# Altium PCB microlab.PcbDoc
Units mil, origin at the board's own origin, x right, y up, seen from the top; angles counter-clockwise.
Board outline 3937.71 x 1968.5 mil, 2 copper layers (Component Side, Bottom Layer), stack 12.8 mil thick; 89 components, 62 nets, 298 pads, 38 vias.
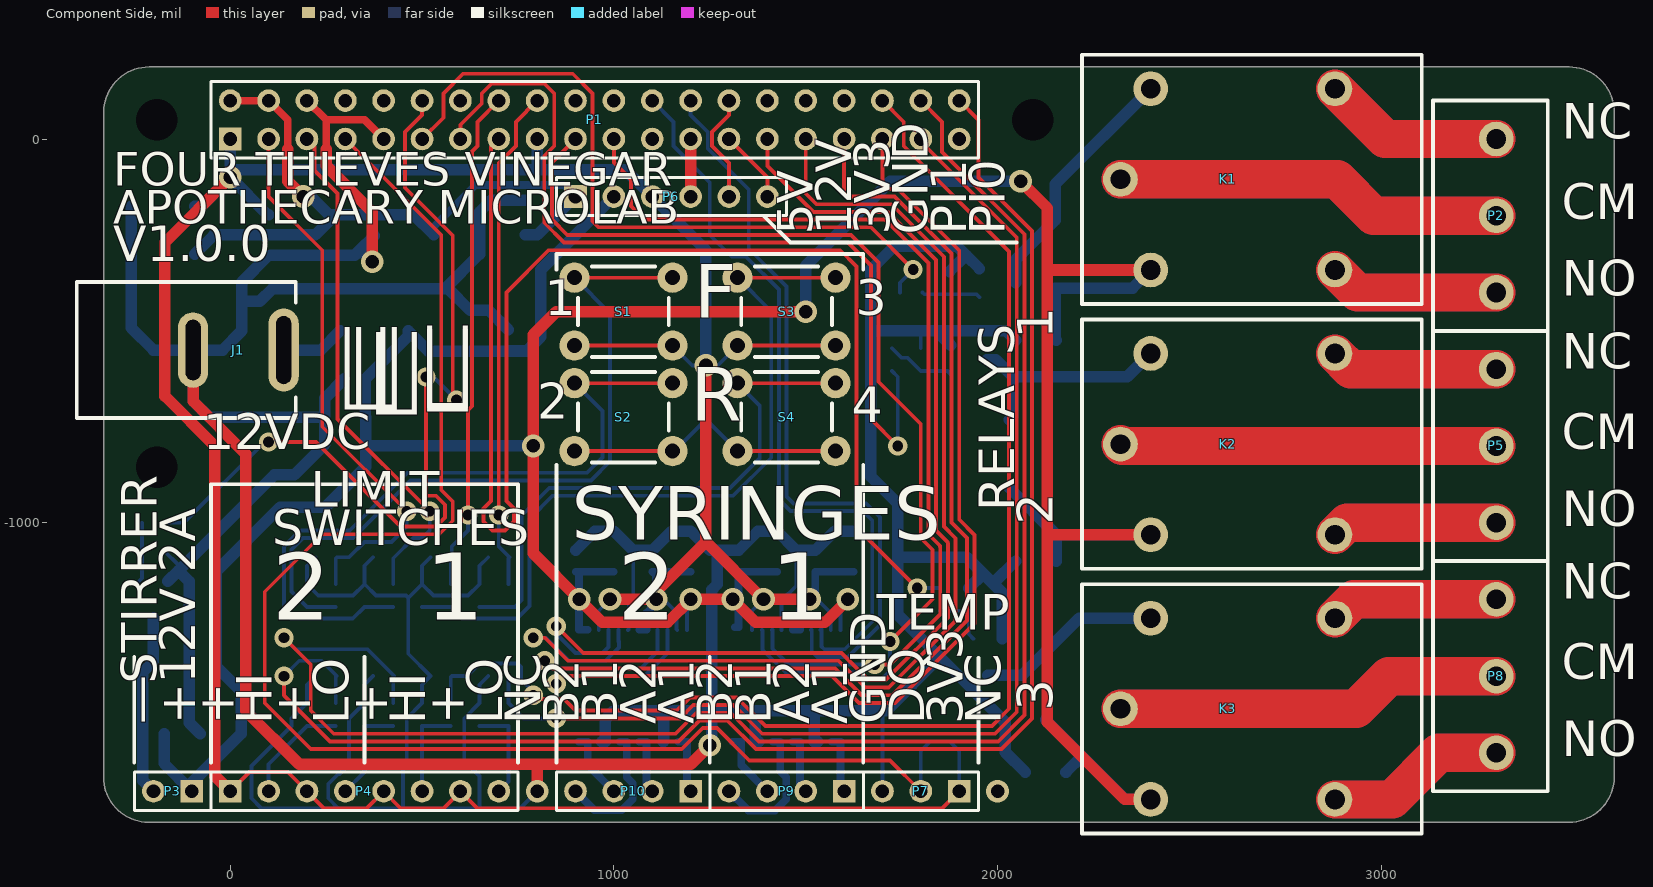
[diagram p0: Component Side view]
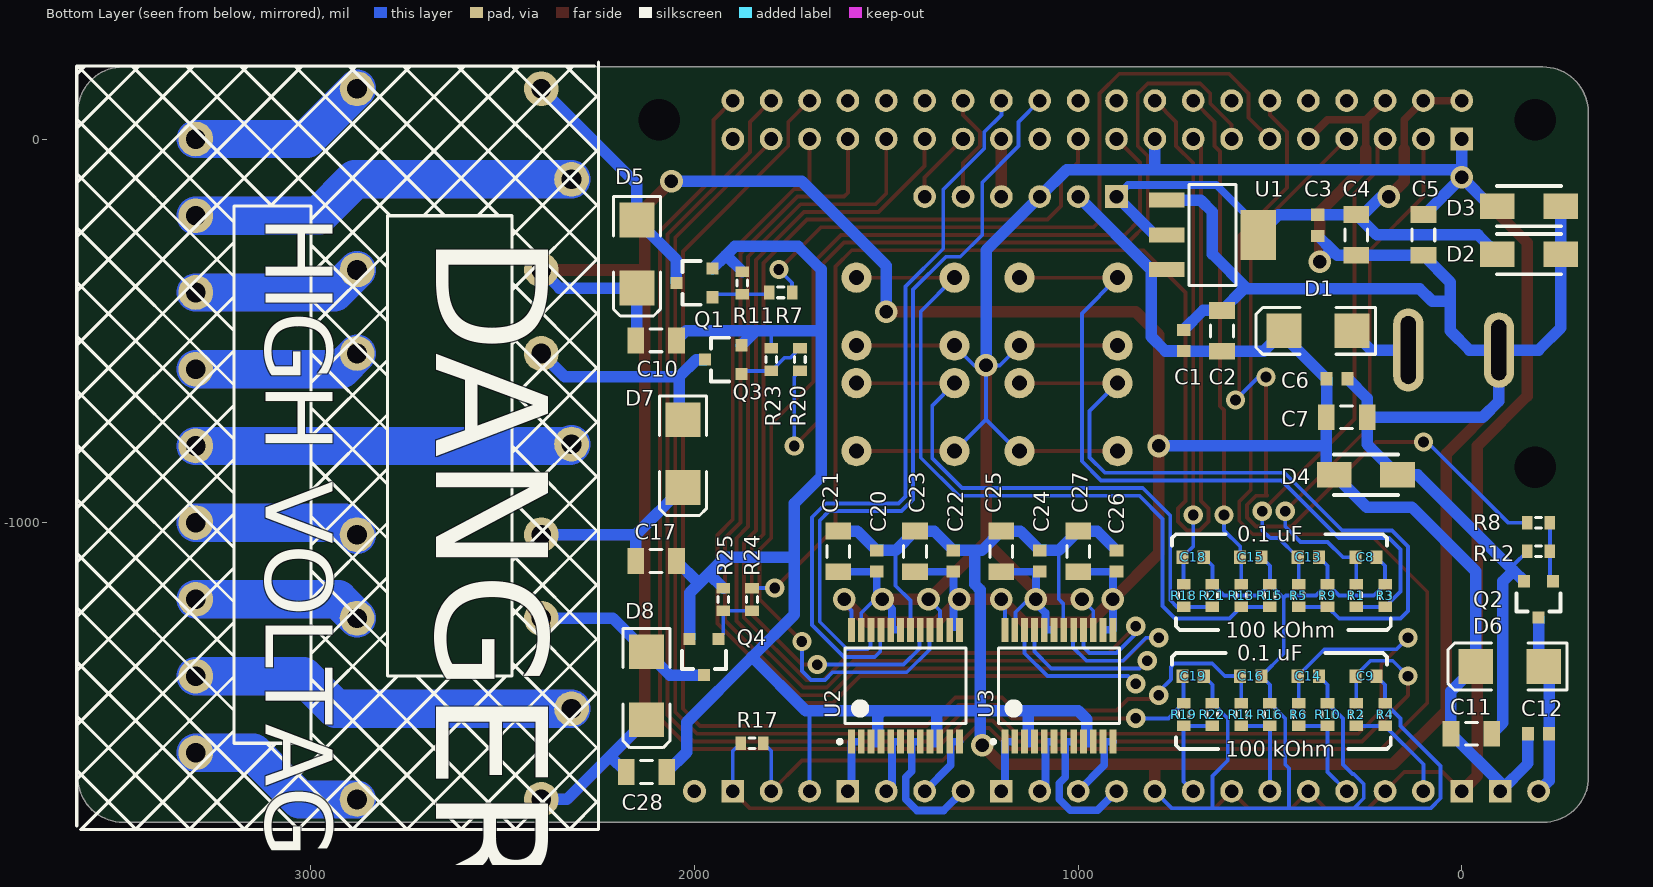
[diagram p1: Bottom Layer view, seen from below]

## Layer stack, top to bottom
Top Solder: solder mask 0.4, Solder Resist, Dk 3.5
Component Side: signal copper 1.4
Dielectric 1: core 10, FR-4, Dk 4.2
Bottom Layer: signal copper 1.4
Solder Side: solder mask 0.4, Solder Resist, Dk 3.5

## Board outline
-330.23,-205.91 -330.23,-1662.71 ccw(c-212.23,-1662.71) -212.23,-1780.71 3213.78,-1780.71 3489.48,-1780.71 ccw(c3489.48,-1662.71) 3607.48,-1662.71 3607.48,-205.91 3607.48,69.8 ccw(c3489.48,69.8) 3489.48,187.8 851.57,187.8 -211.53,187.8 ccw(c-211.53,69.8) -329.53,69.8 -329.53,-205.91

## Design rules (kind name [scope] priority, off if disabled: settings)
Clearance [All] p1: gap=10 except(5: SMDPad-SMDPad)
PolygonConnect [All] p1: connectstyle=Relief reliefconductorwidth=10 reliefentries=4 polygonreliefangle="90 Angle" airgapwidth=10
RoutingLayers [All] p1: top layer_v5=FALSE bottom layer_v5=FALSE
RoutingVias [All] p1: holewidth=28 width=50 viastyle="Through Hole" minholewidth=11.81 minwidth=23.62 maxholewidth=248.03 maxwidth=248.03
SolderMaskExpansion [All] p1: expansion=4
Width [All] p1: maxlimit=1000 minlimit=10 preferedwidth=10
29 further rules are at their usual default settings.

## Components (designator, comment, footprint, x,y, rotation, side; value= is the part's Value field where it differs from the comment)
C1 "Cap Semi" 1608[0603] 725,-525 r270 bottom
C2 "Cap Semi" C1206 625,-500 r270 bottom
C3 "Cap Semi" 1608[0603] 375,-225 r90 bottom
C4 "Cap Semi" C1206 275,-250 r90 bottom
C5 "Cap Semi" C1206 100,-250 r90 bottom
C6 "Cap Semi" 1608[0603] 325,-625 r0 bottom
C7 "Cap Semi" C1206 300,-725 r0 bottom
C8 "Cap Semi" 1608[0603] 250,-1090 r0 bottom
C9 "Cap Semi" 1608[0603] 250,-1400 r0 bottom
C10 "Cap Semi" C1206 2100,-525 r0 bottom
C11 "Cap Semi" C1206 -25,-1550 r0 bottom
C12 "Cap Semi" 1608[0603] -200,-1550 r0 bottom
C13 "Cap Semi" 1608[0603] 400,-1090 r0 bottom
C14 "Cap Semi" 1608[0603] 400,-1400 r0 bottom
C15 "Cap Semi" 1608[0603] 550,-1090 r0 bottom
C16 "Cap Semi" 1608[0603] 550,-1400 r0 bottom
C17 "Cap Semi" C1206 2100,-1100 r0 bottom
C18 "Cap Semi" 1608[0603] 700,-1090 r0 bottom
C19 "Cap Semi" 1608[0603] 700,-1400 r0 bottom
C20 "Cap Semi" 1608[0603] 1525,-1100 r270 bottom
C21 "Cap Semi" C1206 1625,-1075 r270 bottom
C22 "Cap Semi" 1608[0603] 1325,-1100 r270 bottom
C23 "Cap Semi" C1206 1425,-1075 r270 bottom
C24 "Cap Semi" 1608[0603] 1100,-1100 r270 bottom
C25 "Cap Semi" C1206 1200,-1075 r270 bottom
C26 "Cap Semi" 1608[0603] 900,-1100 r270 bottom
C27 "Cap Semi" C1206 1000,-1075 r270 bottom
C28 "Cap Semi" C1206 2125,-1650 r0 bottom
D1 "TSSA5U60" SMB 375,-500 r0 bottom
D2 "824501201" 824501201 -175,-300 r0 bottom
D3 "824501201" 824501201 -175,-175 r0 bottom
D4 "824501201" 824501201 250,-875 r0 bottom
D5 "TSSA5U60" SMB 2150,-300 r270 bottom
D6 "TSSA5U60" SMB -125,-1375 r0 bottom
D7 "TSSA5U60" SMB 2030,-820 r270 bottom
D8 "TSSA5U60" SMB 2125,-1425 r270 bottom
J1 "PJ-037AH" PJ-037AH -400,-550 r0 top
K1 "G5LE-1-VDDC12" G5LE-1-VDDC12 2220,-430 r180 top
K2 "G5LE-1-VDDC12" G5LE-1-VDDC12 2220,-1120 r180 top
K3 "G5LE-1-VDDC12" G5LE-1-VDDC12 2220,-1810 r180 top
P1 "Header 20X2" HDR2X20-centred 950,50 r0 top
P2 "OSTTC032162" OSTTC032162 3300,-400 r90 top
P3 "Header 2" HDR1X2 -100,-1700 r180 top
P4 "Header 8" HDR1X8 0,-1700 r0 top
P5 "OSTTC032162" OSTTC032162 3300,-1000 r90 top
P6 "Header 6" HDR1X6 900,-150 r0 top
P7 "Header 3" HDR1X3 1900,-1700 r180 top
P8 "OSTTC032162" OSTTC032162 3300,-1600 r90 top
P9 "Header 4" HDR1X4 1600,-1700 r180 top
P10 "Header 4" HDR1X4 1200,-1700 r180 top
Q1 "AO3400A" AO3400A 2000,-375 r90 bottom
Q2 "AO3400A" AO3400A -200,-1200 r0 bottom
Q3 "AO3400A" AO3400A 1925,-575 r90 bottom
Q4 "AO3400A" AO3400A 1975,-1350 r0 bottom
R1 "Res1" J1-0603 275,-1190 r270 bottom
R2 "Res1" J1-0603 275,-1500 r270 bottom
R3 "Res1" J1-0603 200,-1190 r270 bottom
R4 "Res1" J1-0603 200,-1500 r270 bottom
R5 "Res1" J1-0603 425,-1190 r270 bottom
R6 "Res1" J1-0603 425,-1500 r270 bottom
R7 "Res1" J1-0603 1775,-400 r180 bottom
R8 "Res1" J1-0603 -200,-1000 r0 bottom
R9 "Res1" J1-0603 350,-1190 r270 bottom
R10 "Res1" J1-0603 350,-1500 r270 bottom
R11 "Res1" J1-0603 1875,-375 r270 bottom
R12 "Res1" J1-0603 -200,-1075 r180 bottom
R13 "Res1" J1-0603 575,-1190 r270 bottom
R14 "Res1" J1-0603 575,-1500 r270 bottom
R15 "Res1" J1-0603 500,-1190 r270 bottom
R16 "Res1" J1-0603 500,-1500 r270 bottom
R17 "Res1" J1-0603 1850,-1575 r0 bottom
R18 "Res1" J1-0603 725,-1190 r270 bottom
R19 "Res1" J1-0603 725,-1500 r270 bottom
R20 "Res1" J1-0603 1725,-575 r270 bottom
R21 "Res1" J1-0603 650,-1190 r270 bottom
R22 "Res1" J1-0603 650,-1500 r270 bottom
R23 "Res1" J1-0603 1800,-575 r270 bottom
R24 "Res1" J1-0603 1850,-1200 r90 bottom
R25 "Res1" J1-0603 1925,-1200 r270 bottom
S1 "1825910-6" 1825910-6 1025,-450 r0 top
S2 "1825910-6" 1825910-6 1025,-725 r0 top
S3 "1825910-6" 1825910-6 1450,-450 r0 top
S4 "1825910-6" 1825910-6 1450,-725 r0 top
U1 "LDL1117S50R" LDL1117S50R 650,-250 r180 bottom
U2 "TB6612FNG,C,8,EL" TB6612FNG,C,8,EL 1450,-1425 r90 bottom
U3 "TB6612FNG,C,8,EL" TB6612FNG,C,8,EL 1050,-1425 r90 bottom
? "" MOUNTING_HOLE_1 -191.73,-855.51 r0 top
? "" MOUNTING_HOLE_1 2091.73,50 r0 top
? "" MOUNTING_HOLE_1 -191.73,50 r0 top

## Footprints (in the part's own frame and the unit in brackets; to place one, negate y for a bottom-side part, rotate by r counter-clockwise, add the part's x,y. Pads: shape width x height; smd on the part's side, far side on the other; paste and mask are expansions set on the pad)
1608[0603] [mm] "Chip Capacitor, Body 1.6x0.8mm, IPC High Density"
  rect 0.8x0.9 smd: 1(-0.7,0) 2(0.7,0)
  body extent -0.87,-0.48 0.87,0.48, height 1.3
1825910-6 [mm] "1825910-6"
  round 2 hole 1: 1(-3.25,-2.25) 1(3.25,-2.25) 2(-3.25,2.25) 2(3.25,2.25)
  silkscreen extent -3,-3 3,3, body extent -3,-3 3,3, height 5
824501201 [mm] "DO-214AC"
  rect 2.3x1.7 smd: 1(-2.1,0) 2(2.1,0)
  silkscreen extent -2.12,-1.34 2.12,1.34, body extent -2.12,-1.34 2.12,1.34, height 2.25
AO3400A [mm] "SOT-23-3L"
  rect 0.8x0.8 smd: D(0,1.2) G(-0.95,-1.2) S(0.95,-1.2)
  silkscreen extent -1.45,-0.4 1.45,0.8, body extent -1.45,-0.8 1.45,0.8, height 1.25
C1206 [mm] "Chip Capacitor, Body 3.2x1.6mm, IPC High Density"
  rect 1.1x1.7 smd: 1(-1.35,0) 2(1.35,0)
  silkscreen extent -0.4,-0.75 0.4,0.75, body extent -1.7,-0.9 1.7,0.9, height 1.3
G5LE-1-VDDC12 [mm] "SPDT (1c)"
  round 2.3 hole 1.3: 1(-2.55,-8.25) 2(-4.55,-2.25) 3(-16.75,-2.25) 4(-16.75,-14.25) 5(-4.55,-14.25)
  silkscreen extent -22.5,-16.5 0,0, body extent -22.5,-16.5 0,0, height 19
HDR1X2 [mm] "Connector; Header; 2 Position"
  rect 1.5x1.5 hole 0.9: 1(0,0)
  round 1.5 hole 0.9: 2(2.54,0)
  silkscreen extent -1.27,-1.27 3.81,1.27
HDR1X3 [mm] "Connector; Header; 3 Position"
  rect 1.5x1.5 hole 0.9: 1(0,0)
  round 1.5 hole 0.9: 2(2.54,0) 3(5.08,0)
  silkscreen extent -1.27,-1.27 6.35,1.27
HDR1X4 [mm] "Connector; Header; 4 Position"
  rect 1.5x1.5 hole 0.9: 1(0,0)
  round 1.5 hole 0.9: 2(2.54,0) 3(5.08,0) 4(7.62,0)
  silkscreen extent -1.27,-1.27 8.89,1.27
HDR1X6 [mm] "Connector; Header; 6 Position"
  rect 1.5x1.5 hole 0.9: 1(0,0)
  round 1.5 hole 0.9: 2(2.54,0) 3(5.08,0) 4(7.62,0) 5(10.16,0) 6(12.7,0)
  silkscreen extent -1.27,-1.27 13.97,1.27
HDR1X8 [mm] "Connector; Header; 8 Position"
  rect 1.5x1.5 hole 0.9: 1(0,0)
  round 1.5 hole 0.9: 2(2.54,0) 3(5.08,0) 4(7.62,0) 5(10.16,0) 6(12.7,0) 7(15.24,0) 8(17.78,0)
  silkscreen extent -1.27,-1.27 19.05,1.27
HDR2X20-centred [mm] "Origin moved - Connector; Header; 20x2 Position"
  rect 1.5x1.5 hole 0.9: 1(-24.13,-1.27)
  round 1.5 hole 0.9: 2(-24.13,1.27) 3(-21.59,-1.27) 4(-21.59,1.27) 5(-19.05,-1.27) 6(-19.05,1.27) 7(-16.51,-1.27) 8(-16.51,1.27) 9(-13.97,-1.27) 10(-13.97,1.27) 11(-11.43,-1.27) 12(-11.43,1.27) 13(-8.89,-1.27) 14(-8.89,1.27) 15(-6.35,-1.27) 16(-6.35,1.27) 17(-3.81,-1.27) 18(-3.81,1.27) 19(-1.27,-1.27) 20(-1.27,1.27) 21(1.27,-1.27) 22(1.27,1.27) 23(3.81,-1.27) 24(3.81,1.27) 25(6.35,-1.27) 26(6.35,1.27) 27(8.89,-1.27) 28(8.89,1.27) 29(11.43,-1.27) 30(11.43,1.27) 31(13.97,-1.27) 32(13.97,1.27) 33(16.51,-1.27) 34(16.51,1.27) 35(19.05,-1.27) 36(19.05,1.27) 37(21.59,-1.27) 38(21.59,1.27) 39(24.13,-1.27) 40(24.13,1.27)
  silkscreen extent -25.4,-2.54 25.4,2.54
J1-0603 [mm] "Chip Resistor, Body 1.6x0.8mm, IPC High Density"
  rect 0.7x0.9 smd: 1(-0.75,0) 2(0.75,0)
  silkscreen extent -0.2,-0.35 0.2,0.35, body extent -0.85,-0.48 0.85,0.48, height 0.9
LDL1117S50R [mm] "SOT-223"
  rect 2.35x1 smd: 1(-3.025,2.3) 2(-3.025,0) 3(-3.025,-2.3)
  rect 2.35x3.3 smd: 4(3.025,0)
  silkscreen extent -1.55,-3.35 1.55,3.35, body extent -1.85,-3.35 1.85,3.35, height 1.8
MOUNTING_HOLE_1 [mm] "RPi Zero W M2.5 Mounting hole 2.75 drill"
  round 0 hole 2.75 unplated mask+3: ""(0,0)
OSTTC032162 [mm] "OSTTC032162"
  round 2.3 hole 1.3: 1(0,0) 2(5.08,0) 3(10.16,0)
  silkscreen extent -2.54,-3.4 12.7,4.2, body extent -2.54,-3.4 12.7,4.2, height 10
PJ-037AH [mm] "PJ-037AH"
  oval 2x5.5 hole 1 slot 4.5 at 90 deg: 1(13.7,0)
  oval 2x5 hole 1 slot 4 at 90 deg: 2(7.7,0)
  silkscreen extent 0,-4.5 14.5,4.5, body extent 0,-4.5 14.5,4.5, height 11
SMB [mm] "DO-214-AA/SMB; 2 C-Bend Leads; Body 5.3 x 3.6 mm, inc. leads (LxW)"
  rect 2.3x2.3 smd: 1(-2.25,0) 2(2.25,0)
  silkscreen extent -3.8,-1.55 4.1,1.55
TB6612FNG,C,8,EL [mm] "24-SSOP"
  rect 1.6x0.45 smd: 1(-3.7,3.575) 2(-3.7,2.925) 3(-3.7,2.275) 4(-3.7,1.625) 5(-3.7,0.975) 6(-3.7,0.325) 7(-3.7,-0.325) 8(-3.7,-0.975) 9(-3.7,-1.625) 10(-3.7,-2.275) 11(-3.7,-2.925) 12(-3.7,-3.575) 13(3.7,-3.575) 14(3.7,-2.925) 15(3.7,-2.275) 16(3.7,-1.625) 17(3.7,-0.975) 18(3.7,-0.325) 19(3.7,0.325) 20(3.7,0.975) 21(3.7,1.625) 22(3.7,2.275) 23(3.7,2.925) 24(3.7,3.575)
  silkscreen extent -3.82,-4 2.5,4.47, body extent -2.9,-4 2.9,4, height 1.6

## Part data
C1 C3 C6 C8 C9 C12 C13 C14 C15 C16 C18 C19 C20 C22 C24 C26: "Capacitor (Semiconductor SIM Model)"
C2 C4 C5 C7 C10 C11 C17 C21 C23 C25 C27 C28: "CL31A106KBHNNNE"
D1 D5 D6 D7 D8: library part "D Schottky", "Schottky Diode"
D2 D3 D4: "TVS DIODE 20V 32.4V DO214AC"
J1: "CONN PWR JACK 2X5.5MM SOLDER"
K1 K2 K3: "RELAY GEN PURPOSE SPDT 10A 12V"
P1: "Header, 20-Pin, Dual row"
P2 P5 P8: library part "Header 3", "Header, 3-Pin"
P3: "Header, 2-Pin"
P4: "Header, 8-Pin"
P6: "Header, 6-Pin"
P7: "Header, 3-Pin"
P9 P10: "Header, 4-Pin"
Q1 Q2 Q3 Q4: "MOSFET N-CH 30V 5.7A SOT23"
R1 R2 R3 R4 R5 R6 R7 R8 R9 R10 R11 R12 R13 R14 R15 R16 R17 R18 R19 R20 R21 R22 R23 R24 R25: "Resistor"
S1 S2 S3 S4: library part SW-PB, "SWITCH TACTILE SPST-NO 0.05A 24V"
U1: "IC REG LINEAR 5V 1.2A SOT223"
U2 U3: "IC MOTOR DRIVER PAR 24SSOP"

## Via types
v1: diameter 50, hole 28, Component Side to Bottom Layer, tented top, 20 vias
v2: diameter 59.06, hole 35.43, Component Side to Bottom Layer, tented top, 16 vias
v3: diameter 59.06, hole 35.43, Component Side to Bottom Layer, 2 vias

## Nets (pads, with @x,y where several pads share a name; then routed paths per layer and width w, separated by ;. In a path a pad name is that pad's centre, name@x,y a point inside that pad or via, vN(x,y) a via of type N, cw(c..) or ccw(c..) an arc to the next point about the centre after c; other vN are vias at no path point)
3V3: C5.2 C20.2 C21.2 C24.2 C25.2 D3.2 P1.1 P1.17 P4.1 P4.3 P4.5 P4.7 P6.3 P7.1 R17.2 S1.1 S2.1 S3.1 S4.1 U2.15 U2.19 U2.20 U2.23 U3.15 U3.19 U3.20 U3.23 | length 9718.3
  Component Side w10: P4.1 50,-1650 150,-1650 P4.3 244.53,-1744.53 355.47,-1744.53 P4.5 444.53,-1744.53 555.47,-1744.53 P4.7 644.53,-1744.53 1855.47,-1744.53 P7.1 ; S2.1@897.05,-813.58 S2.1@1152.95,-813.58 ; S1.1@897.05,-538.58 S1.1@1152.95,-538.58 ; S4.1@1322.05,-813.58 S4.1@1577.95,-813.58 ; S3.1@1322.05,-538.58 S3.1@1577.95,-538.58
  Component Side w30: P4.1 -40,-1660 -40,-800 -170,-670 -170,-270 v2(0,-100) ; v2(990,-1200) v2(1110,-1200) 1110,-1180 1240,-1050 ; v2(1240,-590) 1240,-1050 ; v2(1510,-1200) v2(1390,-1200) 1240,-1050
  Bottom Layer w10: U3.15 960.43,-1229.57 v2(990,-1200) ; v2(1110,-1200) 1130,-1200 1163.43,-1233.43 1163.43,-1277.6 U3.23 ; S2.1@1152.95,-813.58 1157.95,-813.58 1240,-731.54 ; S1.1@1152.95,-538.58 1204.37,-590 v2(1240,-590) ; S4.1@1322.05,-813.58 1240,-731.54 ; S3.1@1322.05,-538.58 1270.63,-590 v2(1240,-590) ; U2.15 1360.43,-1229.57 v2(1390,-1200) ; v2(1510,-1200) 1530,-1200 1565.16,-1235.16 U2.23 ; R17.2 1900,-1595.47 P7.1 ; 1240,-731.54 v2(1240,-590)
  Bottom Layer w20: U3.19@1066.06,-1279.33 1085.12,-1279.33 1085.12,-1234.88 1100,-1220 1100,-1210 v2(1110,-1200) 1110,-1137.56 C24.2@1100.59,-1128.15 ; C24.2 C24.2@1100.59,-1128.15 ; C25.2 C24.2@1100.59,-1128.15 ; U2.19@1466.06,-1279.33 1485.12,-1279.33 1485.12,-1224.88 v2(1510,-1200) 1525,-1185 C20.2 1525.59,-1128.15 C21.2
  Bottom Layer w30: D3.2 -75,-175 v2(0,-100) ; P1.1 v2(0,-100) ; C5.2 96.85,-196.85 v2(0,-100) ; P1.17 800,-80 ; v2(1240,-590) 1240,-290 P6.3 1030,-80 800,-80 ; v2(0,-100) 20,-80 800,-80
5V: C3.2 C4.2 D2.2 P1.2 P1.4 P6.1 U1.2 U1.4 | length 1799.8
  Component Side w20: P1.2 P1.4 150,50 150,-27.11
  Component Side w30: 150,-27.11 150,-110 v2(190,-150)
  Bottom Layer w20: U1.4 530.91,-229.09 640.24,-119.76 869.76,-119.76 P6.1
  Bottom Layer w30: D2.2 -42.32,-250 221.85,-250 C4.2 ; v2(190,-150) 210,-150 256.85,-196.85 C4.2 ; U1.4 478.35,-197.44 C3.2 275.59,-197.44 C4.2 ; U1.2 800,-250 P6.1
12V: C1.2 C2.2 C6.2 C7.2 C10.2 C11.2 C12.2 C17.2 C22.2 C23.2 C26.2 C27.2 C28.2 D1.2 D4.2 D5.2 D6.2 D7.2 D8.2 K1.2 K2.2 K3.2 P3.1 P6.2 U1.3 U2.13 U2.14 U2.24 U3.13 U3.14 U3.24 | length 10377.9
  Component Side w30: v2(1500,-450) 850,-450 790,-510 v2(790,-800) 790,-1080 v2(910,-1200) 970,-1260 1140,-1260 v2(1200,-1200) v2(1310,-1200) 1370,-1260 1550,-1260 v2(1610,-1200) ; v2(2060,-110) 2130,-180 2130,-1031.42 ; 2131.42,-341.42 K1.2 ; K3.2 2331.42,-1721.42 2130,-1520 2130,-1031.42 ; K2.2 2130,-1031.42
  Bottom Layer w10: U3.24 1190.75,-1209.25 v2(1200,-1200) ; U2.24 1590.75,-1229.25 1610,-1210 v2(1610,-1200)
  Bottom Layer w20: C26.2@900.59,-1128.15 C27.2 ; C26.2@909.25,-1136.81 U3.13 U3.14@931.57,-1279.33 ; U2.13@1315.83,-1272.76 1325,-1272.76 C22.2 1325.59,-1128.15 C23.2
  Bottom Layer w30: C12.2 -172.44,-1627.56 P3.1 -100,-1678.15 C11.2 28.15,-1439.57 D6.2 -36.42,-1126.42 130,-960 247.68,-960 D4.2 353.15,-854.53 353.15,-800 ; v2(790,-800) 353.15,-800 ; P6.2 809.45,-340.55 809.45,-515.55 772.44,-552.56 C1.2 724.41,-553.15 C2.2 516.73,-553.15 D1.2 463.58,-513.98 C6.2 352.56,-724.41 C7.2 353.15,-800 ; v2(1500,-450) 1500,-330 1720,-110 v2(2060,-110) ; D7.2 2152.83,-1031.42 ; D8.2 2220,-1608.58 ; 2150,-1031.42 K2.2 ; C17.2 2153.15,-1034.57 ; C10.2 2150,-521.85 D5.2 2351.97,-388.58 K1.2 ; C28.2 2178.58,-1650 2220,-1608.58 ; K3.2 2332.83,-1721.42 2220,-1608.58
BUTTON1: C8.2 P1.3 R1.1 | length 1442.6
  Component Side w10: P1.3 100,-150 240,-290 240,-750 v1(460,-970)
  Bottom Layer w10: R1.1 C8.2@275,-1092.56 ; C8.2 310,-1090 350,-1050 420,-1050 460,-1010 v1(460,-970)
BUTTON2: C13.2 P1.5 R5.1 | length 1341.9
  Component Side w10: P1.5 220,-20 220,-82.43 280,-142.43 280,-730 v1(520,-970)
  Bottom Layer w10: R5.1 C13.2@425,-1092.56 ; C13.2 477.56,-1040 500,-1040 520,-1020 v1(520,-970)
BUTTON3: C15.2 P1.16 R13.1 | length 1308.6
  Component Side w10: v1(620,-980) 620,-706.57 630,-696.57 630,-32.97 644.53,-18.44 644.53,44.53 P1.16
  Bottom Layer w10: R13.1 C15.2@575,-1092.56 ; C15.2 577.56,-1062.44 620,-1020 v1(620,-980)
BUTTON4: C18.2 P1.18 R18.1 | length 1310.8
  Component Side w10: v1(700,-980) 700,-62.97 744.53,-18.44 744.53,44.53 P1.18
  Bottom Layer w10: v1(700,-980) 700,-1062.44 C18.2 ; R18.1 C18.2@725,-1092.56
GND: C1.1 C2.1 C3.1 C4.1 C5.1 C6.1 C7.1 C8.1 C9.1 C10.1 C11.1 C13.1 C14.1 C15.1 C16.1 C17.1 C18.1 C19.1 C20.1 C21.1 C22.1 C23.1 C24.1 C25.1 C26.1 C27.1 C28.1 D2.1 D3.1 D4.1 J1.2 P1.6 P1.9 P7.3 Q1.S Q2.S Q3.S Q4.S R3.1 R4.1 R9.1 R10.1 R11.1 R12.1 R15.1 R16.1 R21.1 R22.1 R23.1 R25.1 U1.1 U2.3 U2.4 U2.9 U2.10 U2.18 U3.3 U3.4 U3.9 U3.10 U3.18 | length 16732
  Component Side w20: P1.6 250,50 ; 250,-27.11 250,50 ; P1.9 350,50 250,50
  Component Side w30: J1.2 -96.85,-683.15 40,-820 40,-1490 180,-1630 800,-1630 ; 250,-27.11 250,-70 370,-190 v2(370,-320) ; v3(800,-1700) 800,-1630 ; v2(1250,-1580) 1200,-1630 800,-1630
  Bottom Layer w10: R12.1 -134.84,-1110.63 ; C9.1 200,-1422.44 R4.1 160,-1510.47 160,-1530 55.47,-1634.53 55.47,-1718.44 81.56,-1744.53 281.56,-1744.53 ; C8.1 200,-1112.44 R3.1 229.53,-1190 320.47,-1190 R9.1 ; C14.1 350,-1422.44 R10.1 310,-1510.47 310,-1630 284.53,-1655.47 281.56,-1655.47 255.47,-1681.56 255.47,-1718.44 281.56,-1744.53 ; C13.1 350,-1112.44 R9.1 ; C15.1 500,-1112.44 R15.1 ; C19.1 650,-1422.44 R22.1 610,-1510.47 610,-1620 650,-1660 650,-1744.53 ; C18.1 650,-1112.44 R21.1 649.53,-1160.47 620,-1190 529.53,-1190 R15.1 ; v3(800,-1700) 755.47,-1744.53 650,-1744.53 ; U3.18 1038.94,-1277.6 1038.94,-1211.06 1050.59,-1199.41 1050.59,-1072.44 ; U2.18 1437.2,-1202.8 1475.59,-1164.41 1475.59,-1072.44 ; P7.3 1700,-1500 1710,-1490 ; R23.1 1800,-500 ; 281.56,-1744.53 450,-1744.53 ; R9.1 350.47,-1160.47 380,-1190 457.75,-1190 464.11,-1196.36 ; 450,-1744.53 450,-1640 460,-1630 460,-1510.47 R16.1 500,-1422.44 C16.1 464.11,-1341.67 464.11,-1196.36 ; 450,-1744.53 650,-1744.53 ; 464.11,-1196.36 R15.1
  Bottom Layer w30: D3.1 D2.1 -257.68,-492.32 -200,-550 J1.2 ; Q2.S -134.84,-1125 ; C11.1 -106.69,-1521.46 -106.69,-1153.15 -134.84,-1125 ; C6.1 246.85,-675.59 C7.1 ; v2(370,-320) 340,-290 337.56,-290 ; C3.1 337.56,-290 ; C1.1 674.41,-446.85 C2.1 568.15,-390 560,-390 ; U1.1 680.55,-159.45 650,-190 650,-300 560,-390 ; C26.1 950.59,-1021.85 C27.1 1050.59,-1072.44 C24.1 1150.59,-1021.85 C25.1 1250.59,-1072.44 C22.1 1375.59,-1021.85 C23.1 1475.59,-1072.44 C20.1 1575.59,-1021.85 C21.1 ; U3.10@968.7,-1570.67 977.76,-1570.67 977.76,-1512.24 1000,-1490 1130,-1490 ; 1128.7,-1570.67 1130,-1569.37 1130,-1490 ; v2(1250,-1580) 1255.47,-1574.53 1255.47,-1174.53 1270,-1160 1270,-1073.86 ; U2.9@1377.76,-1570.67 1368.7,-1570.67 1368.7,-1498.7 1360,-1490 ; U2.3@1531.3,-1570.67 1522.24,-1570.67 1522.24,-1502.24 1510,-1490 ; R11.1 1915.63,-304.84 1920,-304.84 ; Q3.S 1840.16,-500 ; R25.1 1960,-1135.47 ; Q1.S 1920,-304.84 ; 1990,-1156.85 C17.1 ; Q4.S 2012.4,-1182.4 1920,-1090 1740,-1090 ; C10.1 2021.85,-500 1840.16,-500 ; C28.1 2020,-1598.15 2020,-1520 1850,-1350 ; -134.84,-1125 115.16,-875 D4.1 246.85,-795.47 C7.1 ; J1.2 -96.85,-683.15 -55,-725 C7.1 ; J1.2 -20,-550 30,-500 30,-430 ; 30,-430 36.85,-423.15 76.85,-423.15 110,-390 560,-390 ; 30,-430 30,-373.15 C5.1 C4.1 324.41,-303.15 337.56,-290 ; 1130,-1490 1360,-1490 ; 1360,-1490 1510,-1490 ; 1510,-1490 1710,-1490 1850,-1350 ; 1670,-500 1670,-880 1740,-950 1740,-1090 ; 1670,-500 1670,-340 1730,-280 1895.16,-280 1920,-304.84 ; 1670,-500 1840.16,-500 ; 1740,-1090 1740,-1240 1850,-1350
"GPIO_ BCM0": P1.27 P6.6 | length 191.4
  Component Side w10: P1.27 1400,-100 P6.6
"GPIO_ BCM1": P1.28 P6.5 | length 286.9
  Component Side w10: P6.5 1300,-62.97 1255.47,-18.44 1255.47,18.44 1300,62.97 P1.28
"GPIO_ GND": P1.25 P6.4 | length 150
  Component Side w30: P6.4 P1.25
LIMIT1: C9.2 P1.40 R2.1 | length 4067.2
  Component Side w10: v1(140,-1400) 140,-1450 260,-1570 1168.74,-1570 1223.27,-1515.47 1295.47,-1515.47 1370,-1590 2010,-1590 2090,-1510 2090,-240 1950,-100 1950,50 P1.40
  Bottom Layer w10: v1(140,-1400) 180,-1360 237.56,-1360 C9.2 275,-1402.56 R2.1
LIMIT2: C14.2 P1.38 R6.1 | length 4299.7
  Component Side w10: v1(140,-1300) 210,-1370 210,-1490 270,-1550 1160.46,-1550 1214.99,-1495.47 1303.76,-1495.47 1378.28,-1570 2001.72,-1570 2070,-1501.72 2070,-248.28 1855.47,-33.76 1855.47,44.53 P1.38
  Bottom Layer w10: v1(140,-1300) 170,-1330 357.56,-1330 C14.2 425,-1402.56 R6.1
LIMIT3: C16.2 P1.36 R14.1 | length 3398.7
  Component Side w10: v1(790,-1450) 800,-1460 870,-1460 900,-1490 1163.89,-1490 1198.42,-1455.47 1320.33,-1455.47 1394.85,-1530 1985.15,-1530 2030,-1485.15 2030,-292.97 1755.47,-18.44 1755.47,44.53 P1.36
  Bottom Layer w10: R14.1 575,-1402.56 C16.2 617.76,-1400 650.48,-1367.28 749.52,-1367.28 758.31,-1376.07 758.31,-1408.31 790,-1440 v1(790,-1450)
LIMIT4: C19.2 P1.37 R19.1 | length 3078.5
  Component Side w10: v1(850,-1510) 1172.18,-1510 1206.7,-1475.47 1312.04,-1475.47 1386.57,-1550 1993.43,-1550 2050,-1493.43 2050,-256.57 1800,-6.57 P1.37
  Bottom Layer w10: C19.2 725,-1402.56 R19.1 764.53,-1510 v1(850,-1510)
MOTOR1: P1.12 R8.2 | length 2283.2
  Component Side w10: v1(100,-790) 223.43,-790 443.43,-1010 536.57,-1010 560,-986.57 560,-953.43 536.57,-930 508.28,-930 507.57,-929.29 510,-926.86 v1(510,-620) ; P1.12 500,62.97 455.47,18.44 455.47,-127.19 580,-251.72 580,-670 v1(590,-680)
  Bottom Layer w10: R8.2 -120,-1000 90,-790 v1(100,-790) ; v1(510,-620) 530,-620 v1(590,-680)
NetC12_1: C12.1 D6.1 P3.2 Q2.D | length 456.4
  Bottom Layer w30: D6.1 -227.56,-1388.98 C12.1 -227.56,-1672.44 P3.2 ; D6.1@-200,-1361.42 Q2.D
NetD1_1: D1.1 J1.1 | length 167.8
  Bottom Layer w30: J1.1 236.42,-550 D1.1
NetD5_1: D5.1 K1.5 Q1.D | length 651.8
  Bottom Layer w30: Q1.D 2047.24,-314.17 D5.1 2150,-118.11 K1.5
NetD7_1: D7.1 K2.5 Q3.D | length 586.4
  Bottom Layer w30: Q3.D 1995,-575 2040,-620 ; D7.1 2040,-721.42 2040,-620 ; K2.5 2338.11,-620 2040,-620
NetD8_1: D8.1 K3.5 Q4.D | length 485.5
  Bottom Layer w30: Q4.D 2064.17,-1397.24 D8.1 2212.44,-1248.98 K3.5
NetK1_1: K1.1 P2.2 | length 2037.8
  Component Side w100: K1.1 2885.2,-105.2 2980,-200 P2.2
  Bottom Layer w100: K1.1 2885.2,-105.2 2980,-200 P2.2
NetK1_3: K1.3 P2.1 | length 889.6
  Component Side w100: K1.3 2938.03,-400 P2.1
  Bottom Layer w100: K1.3 2938.03,-400 P2.1
NetK1_4: K1.4 P2.3 | length 949.6
  Component Side w100: K1.4 3010.47,0 P2.3
  Bottom Layer w100: K1.4 3010.47,0 P2.3
NetK2_1: K2.1 P5.2 | length 1963.2
  Component Side w100: K2.1 2325.2,-800 P5.2
  Bottom Layer w100: K2.1 2325.2,-800 P5.2
NetK2_3: K2.3 P5.1 | length 867.1
  Component Side w100: K2.3 2910.87,-1000 P5.1
  Bottom Layer w100: K2.3 2910.87,-1000 P5.1
NetK2_4: K2.4 P5.3 | length 875.1
  Component Side w100: K2.4 2920.47,-600 P5.3
  Bottom Layer w100: K2.4 2920.47,-600 P5.3
NetK3_1: K3.1 P8.2 | length 2029.8
  Component Side w100: K3.1 2934.8,-1485.2 3020,-1400 P8.2
  Bottom Layer w100: K3.1 2934.8,-1485.2 3020,-1400 P8.2
NetK3_3: K3.3 P8.1 | length 941.7
  Component Side w100: K3.3 3028.58,-1721.42 3150,-1600 P8.1
  Bottom Layer w100: K3.3 3028.58,-1721.42 3150,-1600 P8.1
NetK3_4: K3.4 P8.3 | length 881.7
  Component Side w100: K3.4 2928.43,-1200 P8.3
  Bottom Layer w100: K3.4 2928.43,-1200 P8.3
NetP4_2: P4.2 R2.2 R4.2 | length 286.9
  Bottom Layer w10: P4.2 100,-1629.53 R4.2 R2.2
NetP4_4: P4.4 R6.2 R10.2 | length 266.2
  Bottom Layer w10: P4.4 350,-1650 R10.2 R6.2
NetP4_6: P4.6 R14.2 R16.2 | length 245.5
  Bottom Layer w10: P4.6 R16.2 R14.2
NetP4_8: P4.8 R19.2 R22.2 | length 255.8
  Bottom Layer w10: R22.2 R19.2 725,-1675 P4.8
NetP9_1: P9.1 U2.1 U2.2 | length 155.5
  Bottom Layer w20: U2.2@1568.43,-1570.67 U2.1 1590.75,-1690.75 P9.1
NetP9_2: P9.2 U2.5 U2.6 | length 154.6
  Bottom Layer w20: U2.6@1466.06,-1570.67 1485.12,-1570.67 1485.12,-1685.12 P9.2
NetP9_3: P9.3 U2.11 U2.12 | length 180
  Bottom Layer w20: U2.12 1331.57,-1570.67 1331.57,-1631.57 P9.3
NetP9_4: P9.4 U2.7 U2.8 | length 357.8
  Bottom Layer w20: P9.4 1350,-1750 1420.04,-1750 1449.53,-1720.51 1449.53,-1663.89 1433.94,-1648.3 1433.94,-1570.67 U2.8@1414.88,-1570.67
NetP10_1: P10.1 U3.1 U3.2 | length 155.5
  Bottom Layer w20: U3.2@1168.43,-1570.67 U3.1 1190.75,-1690.75 P10.1
NetP10_2: P10.2 U3.5 U3.6 | length 154.6
  Bottom Layer w20: U3.6@1066.06,-1570.67 1085.12,-1570.67 1085.12,-1685.12 P10.2
NetP10_3: P10.3 U3.11 U3.12 | length 180
  Bottom Layer w20: U3.12 931.57,-1570.67 931.57,-1631.57 P10.3
NetP10_4: P10.4 U3.7 U3.8 | length 357.4
  Bottom Layer w20: P10.4 949.53,-1749.53 1020.52,-1749.53 1049.53,-1720.51 1049.53,-1679.48 1033.94,-1663.89 1033.94,-1570.67 U3.8@1014.88,-1570.67
NetQ1_G: Q1.G R7.1 R11.2 | length 153.4
  Bottom Layer w10: R7.1 1809.06,-404.53 R11.2 1944.88,-404.53 Q1.G
NetQ2_G: Q2.G R8.1 R12.2 | length 156
  Bottom Layer w10: Q2.G -229.53,-1144.88 R12.2 R8.1
NetQ3_G: Q3.G R20.1 R23.2 | length 180.5
  Bottom Layer w10: R20.1 1749.53,-570 1765.47,-570 R23.2 1869.88,-604.53 Q3.G
NetQ4_G: Q4.G R24.1 R25.2 | length 153.4
  Bottom Layer w10: R24.1 R25.2 1925,-1290.16 Q4.G
NetR1_2: R1.2 R3.2 S1.2 | length 1939.4
  Component Side w10: S1.2@897.05,-361.42 S1.2@1152.95,-361.42
  Bottom Layer w10: R1.2 R3.2 160,-1179.53 160,-1070 190,-1040 320,-1040 470,-890 940,-890 990,-840 990,-454.37 S1.2@897.05,-361.42
NetR5_2: R5.2 R9.2 S2.2 | length 1879.9
  Component Side w10: S2.2@897.05,-636.42 S2.2@1152.95,-636.42
  Bottom Layer w10: R5.2 R9.2 319.53,-1250 160,-1250 140,-1230 140,-1061.72 181.72,-1020 311.72,-1020 461.72,-870 930,-870 970,-830 970,-709.37 S2.2@897.05,-636.42
NetR13_2: R13.2 R15.2 S3.2 | length 1991.1
  Component Side w10: S3.2@1322.05,-361.42 S3.2@1577.95,-361.42
  Bottom Layer w10: R15.2 R13.2 605.47,-1250 747.24,-1250 780,-1217.24 780,-990 840,-930 1310.81,-930 1410,-830.8 1410,-449.37 S3.2@1322.05,-361.42
NetR18_2: R18.2 R21.2 S4.2 | length 1495.2
  Component Side w10: S4.2@1322.05,-636.42 S4.2@1577.95,-636.42
  Bottom Layer w10: R21.2 R18.2 742.19,-1219.53 760,-1201.72 760,-981.72 831.72,-910 1302.52,-910 1380,-832.52 1380,-694.37 S4.2@1322.05,-636.42
RELAY1: P1.11 R7.2 | length 1867.9
  Component Side w10: P1.11 555.47,55.47 555.47,118.44 607.03,170 892.97,170 944.53,118.44 944.53,-214.53 960,-230 1670,-230 v1(1780,-340)
  Bottom Layer w10: R7.2 1745.47,-374.53 v1(1780,-340)
RELAY2: P1.13 R20.2 | length 2298.2
  Component Side w10: P1.13 600,37.03 655.47,92.5 655.47,118.44 681.56,144.53 818.44,144.53 844.53,118.44 844.53,-18.44 818.44,-44.53 818.44,-218.44 870,-270 1610,-270 1670,-330 1670,-730 v1(1740,-800)
  Bottom Layer w10: R20.2 1740,-619.53 v1(1740,-800)
RELAY3: P1.15 R24.2 | length 3656
  Component Side w10: P1.15 680,-20 680,-943.43 660,-963.43 660,-996.57 683.43,-1020 716.57,-1020 740,-996.57 740,-963.43 720,-943.43 720,-400 830,-290 1590,-290 1632.32,-332.32 1632.32,-1012.32 v1(1790.47,-1170.47)
  Bottom Layer w10: v1(1790.47,-1170.47) R24.2
STEPPER1_AIN1: P1.26 U2.21 | length 1958.2
  Bottom Layer w10: P1.26 1200,62.97 1244.53,18.44 1244.53,-24.53 1351.66,-131.66 1351.66,-285.86 1450,-384.19 1450,-931.72 1468.28,-950 1657.77,-950 1693.46,-985.7 1693.46,-1266.47 1609.93,-1350 1530,-1350 1515.71,-1335.71 1515.71,-1279.33 U2.21
STEPPER1_AIN2: P1.24 U2.22 | length 1943.1
  Bottom Layer w10: P1.24 1155.47,44.53 1155.47,-18.44 1250,-112.97 1250,-250 1307.05,-307.05 1344.57,-307.05 1430,-392.48 1430,-940 1460,-970 1649.48,-970 1673.46,-993.98 1673.46,-1258.18 1601.65,-1330 1548.28,-1330 1541.3,-1323.01 1541.3,-1277.6 U2.22 U2.22@1537.83,-1279.33
STEPPER1_BIN1: P1.21 U2.17 | length 2518.1
  Component Side w10: P1.21 1000,-60.94 1044.53,-105.47 1044.53,-174.53 1080,-210 1706.57,-210 1820,-323.43 1820,-1030 1850,-1060 1850,-1061.72 1850.47,-1062.19 1850.47,-1239.53 1720,-1370 v1(1680,-1370)
  Bottom Layer w10: U2.17 1413.35,-1279.33 1413.35,-1328.49 1454.86,-1370 v1(1680,-1370)
STEPPER1_BIN2: P1.19 U2.16 | length 2729.3
  Component Side w10: P1.19 838.44,-61.56 838.44,-210 878.44,-250 1618.28,-250 1690,-321.72 1690,-632.66 1800,-742.66 1800,-1040 1830.47,-1070.47 1830.47,-1199.53 v1(1720,-1310)
  Bottom Layer w10: U2.16 1387.76,-1281.06 1387.76,-1331.18 1446.57,-1390 1640,-1390 1660,-1410 1696.57,-1410 1720,-1386.57 v1(1720,-1310)
STEPPER2_AIN1: P1.33 U3.21 | length 3025.5
  Component Side w10: v1(820,-1360) 840,-1380 1576.86,-1380 1646.86,-1450 1724.85,-1450 1920,-1254.85 1920,-1040 1880,-1000 1880,-298.58 1731.42,-150 1610,-150 1600,-140 P1.33
  Bottom Layer w10: 840,-1380 1070,-1380 1113.98,-1336.02 U3.21
STEPPER2_AIN2: P1.35 U3.22 | length 2976.5
  Component Side w10: v1(850,-1420) 870,-1400 1568.58,-1400 1638.58,-1470 1733.14,-1470 1940,-1263.14 1940,-1031.72 1900,-991.72 1900,-290.29 1739.71,-130 1710,-130 1700,-120 P1.35
  Bottom Layer w10: v1(850,-1420) 870,-1400 1080,-1400 1139.57,-1340.43 U3.22
STEPPER2_BIN1: P1.31 U3.17 | length 3068.4
  Component Side w10: v1(790,-1300) 820,-1300 880,-1360 1585.15,-1360 1655.15,-1430 1716.57,-1430 1890.47,-1256.1 1890.47,-1040.47 1860,-1010 1860,-306.86 1723.14,-170 1528.28,-170 1500,-141.72 P1.31
  Bottom Layer w10: v1(790,-1300) 823.43,-1300 883.43,-1360 978.28,-1360 1013.35,-1324.94 1013.35,-1310 1011.61,-1310 U3.17
STEPPER2_BIN2: P1.29 U3.16 | length 2930.5
  Component Side w10: v1(850,-1270) 920,-1340 1593.43,-1340 1663.43,-1410 1708.28,-1410 1870.47,-1247.81 1870.47,-1053.9 1870,-1053.43 1870,-1050 1840,-1020 1840,-315.15 1714.85,-190 1520,-190 1400,-70 P1.29
  Bottom Layer w10: v1(850,-1270) 850,-1290 900,-1340 970,-1340 986.02,-1323.98 U3.16
THERMOMETER1: P1.7 P7.2 R17.1 | length 3951.4
  Component Side w10: P1.7 550,-250 550,-915.15 580,-945.15 580,-994.85 544.85,-1030 240,-1030 90,-1180 90,-1470 210,-1590 1177.03,-1590 1231.56,-1535.47 1268.44,-1535.47 1352.97,-1620 1720,-1620 P7.2
  Bottom Layer w10: P7.2 1800,-1595.47 R17.1
pads on no net: ?. P1.8 P1.10 P1.14 P1.20 P1.22 P1.23 P1.30 P1.32 P1.34 P1.39
copper on no net:
  other v3: 2000,-1700

## Polygon pours and split planes (outlines as drawn)
no net on Bottom Overlay "Bottom Overlay-No Net" (hatched 45Degree grid 100 track 8): 2250,200 2260,190 3610,190 3610,-1790 3600,-1800 2250,-1800

## Silkscreen, mask and mechanical layers (free items; w line width, h text height)
Top Overlay:
  lines w10: -250,-1625 -250,-1350 ; -50,-1625 -50,-900 750,-900 750,-1625 ; 350,-1625 350,-1350 ; 850,-1625 850,-850 ; 850,-340 850,-300 1650,-300 1650,-340 ; 1250,-1625 1250,-1350 ; 1390,-200 1460,-270 2050,-270 ; 1650,-1625 1650,-850 ; 1950,-1625 1950,-1352.4
  text "NC" at 3470,-30 h160
  text "FOUR THIEVES VINEGAR" at -305,-150 h150
  text "CM" at 3470,-240 h160
  text "APOTHECARY MICROLAB" at -305,-250 h150
  text "5V" at 1550,-250 h160 r90
  text "12V" at 1650,-250 h160 r90
  text "3V3" at 1750,-250 h160 r90
  text "GND" at 1850,-250 h160 r90
  text "PI1" at 1950,-250 h160 r90
  text "PI0" at 2050,-250 h160 r90
  text "V1.0.0" at -305,-350 h160
  text "NO" at 3470,-440 h160
  text "1" at 820,-490 h160
  text "3" at 1630,-490 h160
  text "F" at 1210,-510 h240
  text "NC" at 3470,-630 h160
  text "2" at 800,-760 h160
  text "4" at 1620,-770 h160
  text "R" at 1200,-780 h240
  text "" at 500,-795 h500
  text "" at 285,-800 h500
  text "" at 315,-800 h500
  text "" at 500,-805 h500
  text "" at 367,-813 h500
  text "12VDC" at -70,-840 h160
  text "CM" at 3470,-840 h160
  text "RELAYS" at 2075,-970 h160 r90
  text "LIMIT" at 210,-990 h160
  text "NO" at 3470,-1040 h160
  text "SWITCHES" at 110,-1090 h160
  text "SYRINGES" at 890,-1090 h240
  text "NC" at 3470,-1230 h160
  text "2" at 110,-1310 h300
  text "1" at 510,-1310 h300
  text "2" at 1010,-1310 h300
  text "1" at 1410,-1310 h300
  text "TEMP" at 1685,-1310 h160
  text "STIRRER" at -160,-1420 h160 r90
  text "12V 2A" at -60,-1420 h160 r90
  text "CM" at 3470,-1440 h160
  text "3          2          1" at 2175,-1490 h160 r90
  text "—" at -160,-1525 h160 r90
  text "+" at -60,-1525 h160 r90
  text "+" at 40,-1525 h160 r90
  text "HI" at 140,-1525 h160 r90
  text "+" at 240,-1525 h160 r90
  text "LO" at 340,-1525 h160 r90
  text "+" at 440,-1525 h160 r90
  text "HI" at 540,-1525 h160 r90
  text "+" at 640,-1525 h160 r90
  text "LO" at 740,-1525 h160 r90
  text "NC" at 840,-1525 h160 r90
  text "B2" at 940,-1525 h160 r90
  text "B1" at 1040,-1525 h160 r90
  text "A2" at 1140,-1525 h160 r90
  text "A1" at 1240,-1525 h160 r90
  text "B2" at 1340,-1525 h160 r90
  text "B1" at 1440,-1525 h160 r90
  text "A2" at 1540,-1525 h160 r90
  text "A1" at 1640,-1525 h160 r90
  text "GND" at 1740,-1525 h160 r90
  text "DQ" at 1840,-1525 h160 r90
  text "3V3" at 1940,-1525 h160 r90
  text "NC" at 2040,-1525 h160 r90
  text "NO" at 3470,-1640 h160
Bottom Overlay:
  pour cut-out: 3000,-175 3200,-175 3200,-1575 3000,-1575
  pour cut-out: 2475,-200 2800,-200 2800,-1400 2475,-1400
  lines w10: 185,-1560 185,-1580 195,-1590 295,-1590 ; 185,-1250 185,-1270 195,-1280 295,-1280 ; 195,-1370 195,-1350 205,-1340 355,-1340 ; 195,-1060 195,-1040 205,-1030 355,-1030 ; 615,-1340 745,-1340 755,-1350 755,-1370 ; 615,-1030 745,-1030 755,-1040 755,-1060 ; 635,-1590 735,-1590 745,-1580 745,-1560 ; 635,-1280 735,-1280 745,-1270 745,-1250
  text "HIGH VOLTAGE" at 3175,-200 h300 r90
  text "DANGER" at 2768.77,-250 h500 r90
  text "0.1 uF" at 585,-1050 h40
  text "100 kOhm" at 615,-1300 h40
  text "0.1 uF" at 585,-1360 h40
  text "100 kOhm" at 615,-1610 h40
Mechanical 3:
  the board outline again, w10